# EAGLE board Line sensors - 6 (panel) (EAGLE 9.5.2)
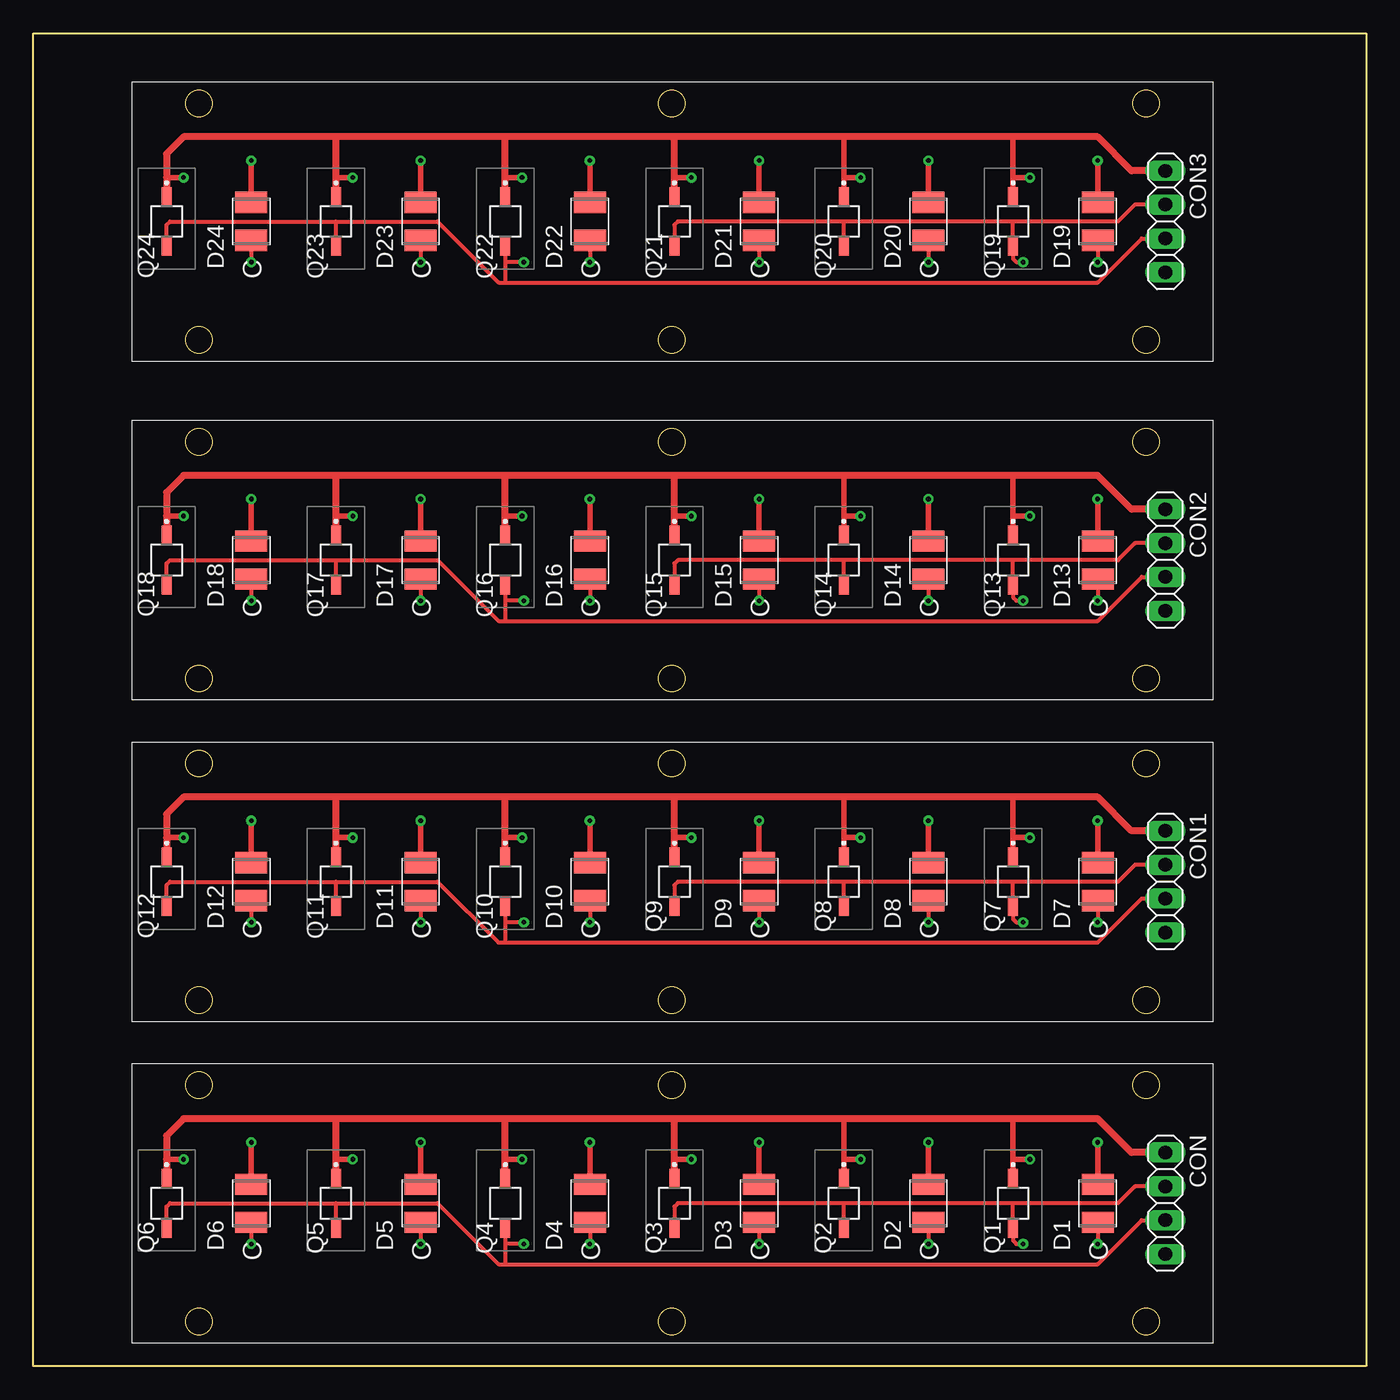
[diagram p0: board, top side]
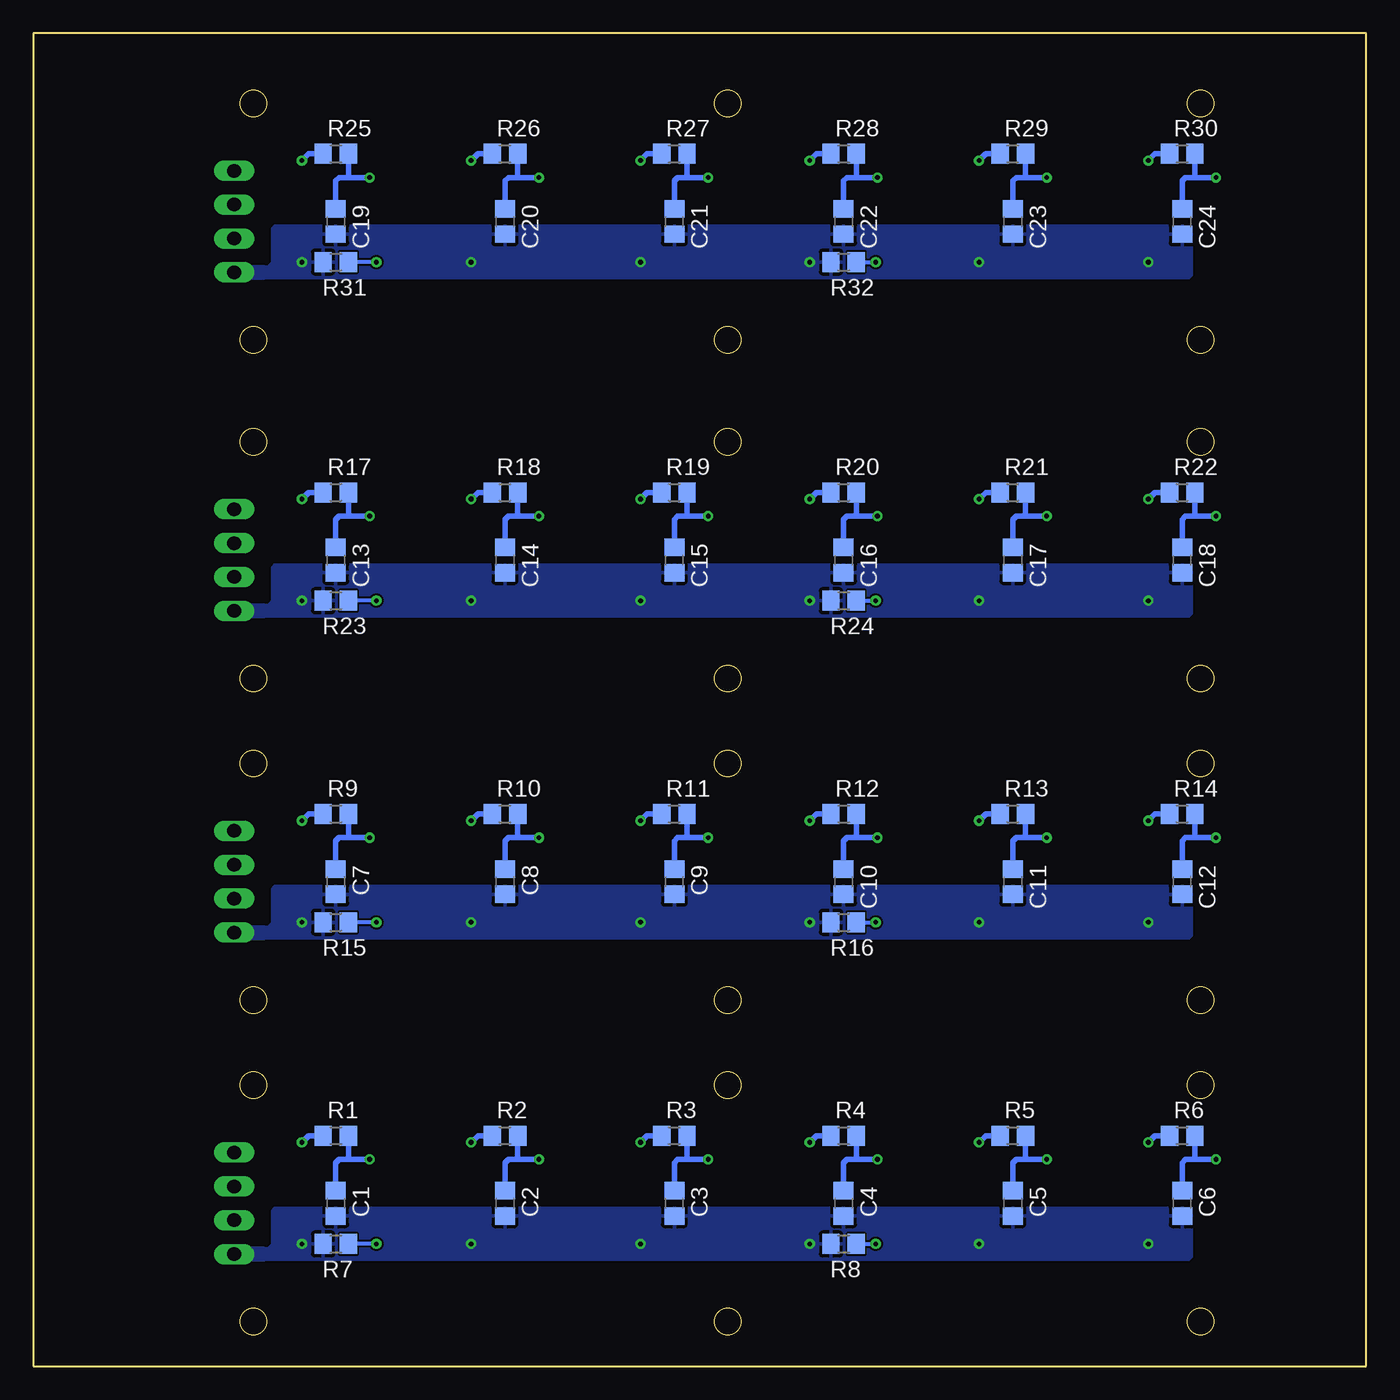
[diagram p1: board, bottom side, seen from below]

Size 100 x 100 mm. Coordinates in mm from the lower left corner, seen from the top.
Outline: 0,0 0,100 100,100 100,0 0,0
Outline: circle at 83.5,3.33 radius 1
Outline: circle at 83.5,21.09 radius 1
Outline: circle at 83.5,21.09 radius 1
Outline: circle at 12.41,21.09 radius 1
Outline: circle at 83.5,3.33 radius 1
Outline: circle at 47.91,21.09 radius 1
Outline: circle at 12.41,3.33 radius 1
Outline: circle at 47.91,3.33 radius 1
Outline: circle at 12.41,3.33 radius 1
Outline: circle at 47.91,3.33 radius 1
Outline: circle at 47.91,21.09 radius 1
Outline: circle at 12.41,21.09 radius 1
Outline: circle at 83.5,27.46 radius 1
Outline: circle at 83.5,45.22 radius 1
Outline: circle at 83.5,45.22 radius 1
Outline: circle at 12.41,45.22 radius 1
Outline: circle at 83.5,27.46 radius 1
Outline: circle at 47.91,45.22 radius 1
Outline: circle at 12.41,27.46 radius 1
Outline: circle at 47.91,27.46 radius 1
Copper layers (1*16): Top 0.035mm / dielectric 1.5mm / Bottom 0.035mm
Design rules "default": minimum track width 6mil, minimum drill 0.35mm, track to track 6mil, track to pad 6mil, pad to pad 6mil, via to via 6mil, smd to smd 6mil, copper to edge 40mil, drill to drill 6mil, minimum pad ring 10mil, minimum via ring 8mil, stop-mask expansion 4mil, vias tented up to drill 0mil, thermal gap 10mil

## Footprints (pad centres in the part's own frame; a part is rotated, then mirrored left to right if it is on the bottom)
C0805 = smd 1.3 x 1.5: 1 -0.95,0; 2 0.95,0
1X04 = drill 1.016 long: 1 -3.81,0; 2 -1.27,0; 3 1.27,0; 4 3.81,0
3528-2PIN = smd 1.6 x 2.4: 1 -1.425,0; 2 1.425,0
VEMT2520X01 = smd 1.35 x 0.75: 1 -1.9,0; 2 1.9,0
R0805 = smd 1.3 x 1.5: 1 -0.95,0; 2 0.95,0

## Placement (x,y rotation side)
C1  [C0805]  77.31,12.22 270 bottom
C2  [C0805]  64.61,12.22 270 bottom
C3  [C0805]  51.91,12.22 270 bottom
C4  [C0805]  39.21,12.22 270 bottom
C5  [C0805]  26.51,12.22 270 bottom
C6  [C0805]  13.81,12.22 270 bottom
C7  [C0805]  77.31,36.35 270 bottom
C8  [C0805]  64.61,36.35 270 bottom
C9  [C0805]  51.91,36.35 270 bottom
C10  [C0805]  39.21,36.35 270 bottom
C11  [C0805]  26.51,36.35 270 bottom
C12  [C0805]  13.81,36.35 270 bottom
C13  [C0805]  77.31,60.48 270 bottom
C14  [C0805]  64.61,60.48 270 bottom
C15  [C0805]  51.91,60.48 270 bottom
C16  [C0805]  39.21,60.48 270 bottom
C17  [C0805]  26.51,60.48 270 bottom
C18  [C0805]  13.81,60.48 270 bottom
C19  [C0805]  77.31,85.88 270 bottom
C20  [C0805]  64.61,85.88 270 bottom
C21  [C0805]  51.91,85.88 270 bottom
C22  [C0805]  39.21,85.88 270 bottom
C23  [C0805]  26.51,85.88 270 bottom
C24  [C0805]  13.81,85.88 270 bottom
CON  [1X04]  84.93,12.22 270 top
CON1  [1X04]  84.93,36.35 270 top
CON2  [1X04]  84.93,60.48 270 top
CON3  [1X04]  84.93,85.88 270 top
D1  [3528-2PIN]  79.85,12.22 90 top
D2  [3528-2PIN]  67.15,12.22 90 top
D3  [3528-2PIN]  54.45,12.22 90 top
D4  [3528-2PIN]  41.75,12.22 90 top
D5  [3528-2PIN]  29.05,12.22 90 top
D6  [3528-2PIN]  16.35,12.22 90 top
D7  [3528-2PIN]  79.85,36.35 90 top
D8  [3528-2PIN]  67.15,36.35 90 top
D9  [3528-2PIN]  54.45,36.35 90 top
D10  [3528-2PIN]  41.75,36.35 90 top
D11  [3528-2PIN]  29.05,36.35 90 top
D12  [3528-2PIN]  16.35,36.35 90 top
D13  [3528-2PIN]  79.85,60.48 90 top
D14  [3528-2PIN]  67.15,60.48 90 top
D15  [3528-2PIN]  54.45,60.48 90 top
D16  [3528-2PIN]  41.75,60.48 90 top
D17  [3528-2PIN]  29.05,60.48 90 top
D18  [3528-2PIN]  16.35,60.48 90 top
D19  [3528-2PIN]  79.85,85.88 90 top
D20  [3528-2PIN]  67.15,85.88 90 top
D21  [3528-2PIN]  54.45,85.88 90 top
D22  [3528-2PIN]  41.75,85.88 90 top
D23  [3528-2PIN]  29.05,85.88 90 top
D24  [3528-2PIN]  16.35,85.88 90 top
Q1  VEMT2520X01  [VEMT2520X01]  73.5,12.22 270 top
Q2  VEMT2520X01  [VEMT2520X01]  60.8,12.22 270 top
Q3  VEMT2520X01  [VEMT2520X01]  48.1,12.22 270 top
Q4  VEMT2520X01  [VEMT2520X01]  35.4,12.22 270 top
Q5  VEMT2520X01  [VEMT2520X01]  22.7,12.22 270 top
Q6  VEMT2520X01  [VEMT2520X01]  10,12.22 270 top
Q7  VEMT2520X01  [VEMT2520X01]  73.5,36.35 270 top
Q8  VEMT2520X01  [VEMT2520X01]  60.8,36.35 270 top
Q9  VEMT2520X01  [VEMT2520X01]  48.1,36.35 270 top
Q10  VEMT2520X01  [VEMT2520X01]  35.4,36.35 270 top
Q11  VEMT2520X01  [VEMT2520X01]  22.7,36.35 270 top
Q12  VEMT2520X01  [VEMT2520X01]  10,36.35 270 top
Q13  VEMT2520X01  [VEMT2520X01]  73.5,60.48 270 top
Q14  VEMT2520X01  [VEMT2520X01]  60.8,60.48 270 top
Q15  VEMT2520X01  [VEMT2520X01]  48.1,60.48 270 top
Q16  VEMT2520X01  [VEMT2520X01]  35.4,60.48 270 top
Q17  VEMT2520X01  [VEMT2520X01]  22.7,60.48 270 top
Q18  VEMT2520X01  [VEMT2520X01]  10,60.48 270 top
Q19  VEMT2520X01  [VEMT2520X01]  73.5,85.88 270 top
Q20  VEMT2520X01  [VEMT2520X01]  60.8,85.88 270 top
Q21  VEMT2520X01  [VEMT2520X01]  48.1,85.88 270 top
Q22  VEMT2520X01  [VEMT2520X01]  35.4,85.88 270 top
Q23  VEMT2520X01  [VEMT2520X01]  22.7,85.88 270 top
Q24  VEMT2520X01  [VEMT2520X01]  10,85.88 270 top
R1  [R0805]  77.31,17.3 0 bottom
R2  [R0805]  64.61,17.3 0 bottom
R3  [R0805]  51.91,17.3 0 bottom
R4  [R0805]  39.21,17.3 0 bottom
R5  [R0805]  26.51,17.3 0 bottom
R6  [R0805]  13.81,17.3 0 bottom
R7  [R0805]  77.31,9.17 0 bottom
R8  [R0805]  39.21,9.17 0 bottom
R9  [R0805]  77.31,41.43 0 bottom
R10  [R0805]  64.61,41.43 0 bottom
R11  [R0805]  51.91,41.43 0 bottom
R12  [R0805]  39.21,41.43 0 bottom
R13  [R0805]  26.51,41.43 0 bottom
R14  [R0805]  13.81,41.43 0 bottom
R15  [R0805]  77.31,33.3 0 bottom
R16  [R0805]  39.21,33.3 0 bottom
R17  [R0805]  77.31,65.56 0 bottom
R18  [R0805]  64.61,65.56 0 bottom
R19  [R0805]  51.91,65.56 0 bottom
R20  [R0805]  39.21,65.56 0 bottom
R21  [R0805]  26.51,65.56 0 bottom
R22  [R0805]  13.81,65.56 0 bottom
R23  [R0805]  77.31,57.43 0 bottom
R24  [R0805]  39.21,57.43 0 bottom
R25  [R0805]  77.31,90.96 0 bottom
R26  [R0805]  64.61,90.96 0 bottom
R27  [R0805]  51.91,90.96 0 bottom
R28  [R0805]  39.21,90.96 0 bottom
R29  [R0805]  26.51,90.96 0 bottom
R30  [R0805]  13.81,90.96 0 bottom
R31  [R0805]  77.31,82.83 0 bottom
R32  [R0805]  39.21,82.83 0 bottom

## Library data of the parts
C1-C24 = rcl; SPICEPREFIX: C
CON CON1-CON3 = pinhead
D1-D24 = Wurth_Elektronik_Optoelectronics_rev15b; COMPANY-URL: http://www.we-online.de; CREATED-BY: Christin Otto; CREATED-DATE: APR 2013; DATASHEET-URL: http://katalog.we-online.de/en/led/WL-SMTW?m=t&sq=smtw&sp=&sp=http%3A%2F%2Fwww.we-online.de%2Fweb%2Fen%2Felectronic_components%2Fsearchpage_PBS.php%3Fsearch%3Dsmtw; MANUFACTURER: Würth Elektronik eiSos GmbH
Q1-Q24 = Fototransistor; DESCRIPTION: Vishay VEMT2520X01 +/-15 IR + Visible Light Phototransistor, Surface Mount 2-Pin Reverse Gullwing Package; HEIGHT: 2mm; MANUFACTURER_NAME: Vishay; MANUFACTURER_PART_NUMBER: VEMT2520X01; MOUSER_PART_NUMBER: 782-VEMT2520X01; MOUSER_PRICE-STOCK: https://www.mouser.com/Search/Refine.aspx?Keyword=782-VEMT2520X01; RS_PART_NUMBER: 7689417P; RS_PRICE-STOCK: http://uk.rs-online.com/web/p/products/7689417P
R1-R32 = rcl; SPICEPREFIX: R

## Nets
GND: C1.2 C2.2 C3.2 C4.2 C5.2 C6.2 CON.4 D1.1 D2.1 D3.1 D4.1 D5.1 D6.1 R7.1 R8.1
GND1: C7.2 C8.2 C9.2 C10.2 C11.2 C12.2 CON1.4 D7.1 D8.1 D9.1 D10.1 D11.1 D12.1 R15.1 R16.1
GND2: C13.2 C14.2 C15.2 C16.2 C17.2 C18.2 CON2.4 D13.1 D14.1 D15.1 D16.1 D17.1 D18.1 R23.1 R24.1
GND3: C19.2 C20.2 C21.2 C22.2 C23.2 C24.2 CON3.4 D19.1 D20.1 D21.1 D22.1 D23.1 D24.1 R31.1 R32.1
N$1: D1.2 R1.1
N$2: D2.2 R2.1
N$3: D3.2 R3.1
N$4: D4.2 R4.1
N$5: D5.2 R5.1
N$6: D6.2 R6.1
N$7: D7.2 R9.1
N$8: D8.2 R10.1
N$9: D9.2 R11.1
N$10: D10.2 R12.1
N$11: D11.2 R13.1
N$12: D12.2 R14.1
N$13: D13.2 R17.1
N$14: D14.2 R18.1
N$15: D15.2 R19.1
N$16: D16.2 R20.1
N$17: D17.2 R21.1
N$18: D18.2 R22.1
N$19: D19.2 R25.1
N$20: D20.2 R26.1
N$21: D21.2 R27.1
N$22: D22.2 R28.1
N$23: D23.2 R29.1
N$24: D24.2 R30.1
SIG1: CON.2 Q1.2 Q2.2 Q3.2 R7.2
SIG2: CON.3 Q4.2 Q5.2 Q6.2 R8.2
SIG3: CON1.2 Q7.2 Q8.2 Q9.2 R15.2
SIG4: CON1.3 Q10.2 Q11.2 Q12.2 R16.2
SIG5: CON2.2 Q13.2 Q14.2 Q15.2 R23.2
SIG6: CON2.3 Q16.2 Q17.2 Q18.2 R24.2
SIG7: CON3.2 Q19.2 Q20.2 Q21.2 R31.2
SIG8: CON3.3 Q22.2 Q23.2 Q24.2 R32.2
V+: C1.1 C2.1 C3.1 C4.1 C5.1 C6.1 CON.1 Q1.1 Q2.1 Q3.1 Q4.1 Q5.1 Q6.1 R1.2 R2.2 R3.2 R4.2 R5.2 R6.2
V+1: C7.1 C8.1 C9.1 C10.1 C11.1 C12.1 CON1.1 Q7.1 Q8.1 Q9.1 Q10.1 Q11.1 Q12.1 R9.2 R10.2 R11.2 R12.2 R13.2 R14.2
V+2: C13.1 C14.1 C15.1 C16.1 C17.1 C18.1 CON2.1 Q13.1 Q14.1 Q15.1 Q16.1 Q17.1 Q18.1 R17.2 R18.2 R19.2 R20.2 R21.2 R22.2
V+3: C19.1 C20.1 C21.1 C22.1 C23.1 C24.1 CON3.1 Q19.1 Q20.1 Q21.1 Q22.1 Q23.1 Q24.1 R25.2 R26.2 R27.2 R28.2 R29.2 R30.2

## Tracks (layer width: path | path; a pad name or v marks a point on that pad's centre or on a via)
GND  (via drill 0.35)
  Top 0.305: D6.1 v16.35,9.17 | D5.1 v29.05,9.17 | D4.1 v41.75,9.17 | D3.1 v54.45,9.17 | D2.1 v67.15,9.17 | D1.1 v79.85,9.17
  pour Bottom (no thermals): 82.64,8.92 84.93,8.92 84.93,7.9 82.64,7.9
  pour Bottom: 13.05,11.97 13.05,8.16 13.3,7.9 82.9,7.9 82.9,8.92 82.39,8.92 82.14,9.17 82.14,11.71 81.88,11.97
GND1  (via drill 0.35)
  Top 0.305: D12.1 v16.35,33.3 | D11.1 v29.05,33.3 | D10.1 v41.75,33.3 | D9.1 v54.45,33.3 | D8.1 v67.15,33.3 | D7.1 v79.85,33.3
  pour Bottom (no thermals): 82.64,33.05 84.93,33.05 84.93,32.03 82.64,32.03
  pour Bottom: 13.05,36.1 13.05,32.29 13.3,32.03 82.9,32.03 82.9,33.05 82.39,33.05 82.14,33.3 82.14,35.84 81.88,36.1
GND2  (via drill 0.35)
  Top 0.305: D18.1 v16.35,57.43 | D17.1 v29.05,57.43 | D16.1 v41.75,57.43 | D15.1 v54.45,57.43 | D14.1 v67.15,57.43 | D13.1 v79.85,57.43
  pour Bottom (no thermals): 82.64,57.18 84.93,57.18 84.93,56.16 82.64,56.16
  pour Bottom: 13.05,60.23 13.05,56.42 13.3,56.16 82.9,56.16 82.9,57.18 82.39,57.18 82.14,57.43 82.14,59.97 81.88,60.23
GND3  (via drill 0.35)
  Top 0.305: D24.1 v16.35,82.83 | D23.1 v29.05,82.83 | D22.1 v41.75,82.83 | D21.1 v54.45,82.83 | D20.1 v67.15,82.83 | D19.1 v79.85,82.83
  pour Bottom (no thermals): 82.64,82.58 84.93,82.58 84.93,81.56 82.64,81.56
  pour Bottom: 13.05,85.63 13.05,81.82 13.3,81.56 82.9,81.56 82.9,82.58 82.39,82.58 82.14,82.83 82.14,85.37 81.88,85.63
N$1  (via drill 0.35)
  Top 0.406: v79.85,16.79 D1.2
  Bottom 0.406: R1.1 79.34,17.3 v79.85,16.79
N$2  (via drill 0.35)
  Top 0.406: v67.15,16.79 D2.2
  Bottom 0.406: R2.1 66.64,17.3 v67.15,16.79
N$3  (via drill 0.35)
  Top 0.406: v54.45,16.79 D3.2
  Bottom 0.406: R3.1 53.94,17.3 v54.45,16.79
N$4  (via drill 0.35)
  Top 0.406: v41.75,16.79 D4.2
  Bottom 0.406: R4.1 41.24,17.3 v41.75,16.79
N$5  (via drill 0.35)
  Top 0.406: v29.05,16.79 D5.2
  Bottom 0.406: R5.1 28.54,17.3 v29.05,16.79
N$6  (via drill 0.35)
  Top 0.406: v16.35,16.79 D6.2
  Bottom 0.406: R6.1 15.84,17.3 v16.35,16.79
N$7  (via drill 0.35)
  Top 0.406: v79.85,40.92 D7.2
  Bottom 0.406: R9.1 79.34,41.43 v79.85,40.92
N$8  (via drill 0.35)
  Top 0.406: v67.15,40.92 D8.2
  Bottom 0.406: R10.1 66.64,41.43 v67.15,40.92
N$9  (via drill 0.35)
  Top 0.406: v54.45,40.92 D9.2
  Bottom 0.406: R11.1 53.94,41.43 v54.45,40.92
N$10  (via drill 0.35)
  Top 0.406: v41.75,40.92 D10.2
  Bottom 0.406: R12.1 41.24,41.43 v41.75,40.92
N$11  (via drill 0.35)
  Top 0.406: v29.05,40.92 D11.2
  Bottom 0.406: R13.1 28.54,41.43 v29.05,40.92
N$12  (via drill 0.35)
  Top 0.406: v16.35,40.92 D12.2
  Bottom 0.406: R14.1 15.84,41.43 v16.35,40.92
N$13  (via drill 0.35)
  Top 0.406: v79.85,65.05 D13.2
  Bottom 0.406: R17.1 79.34,65.56 v79.85,65.05
N$14  (via drill 0.35)
  Top 0.406: v67.15,65.05 D14.2
  Bottom 0.406: R18.1 66.64,65.56 v67.15,65.05
N$15  (via drill 0.35)
  Top 0.406: v54.45,65.05 D15.2
  Bottom 0.406: R19.1 53.94,65.56 v54.45,65.05
N$16  (via drill 0.35)
  Top 0.406: v41.75,65.05 D16.2
  Bottom 0.406: R20.1 41.24,65.56 v41.75,65.05
N$17  (via drill 0.35)
  Top 0.406: v29.05,65.05 D17.2
  Bottom 0.406: R21.1 28.54,65.56 v29.05,65.05
N$18  (via drill 0.35)
  Top 0.406: v16.35,65.05 D18.2
  Bottom 0.406: R22.1 15.84,65.56 v16.35,65.05
N$19  (via drill 0.35)
  Top 0.406: v79.85,90.45 D19.2
  Bottom 0.406: R25.1 79.34,90.96 v79.85,90.45
N$20  (via drill 0.35)
  Top 0.406: v67.15,90.45 D20.2
  Bottom 0.406: R26.1 66.64,90.96 v67.15,90.45
N$21  (via drill 0.35)
  Top 0.406: v54.45,90.45 D21.2
  Bottom 0.406: R27.1 53.94,90.96 v54.45,90.45
N$22  (via drill 0.35)
  Top 0.406: v41.75,90.45 D22.2
  Bottom 0.406: R28.1 41.24,90.96 v41.75,90.45
N$23  (via drill 0.35)
  Top 0.406: v29.05,90.45 D23.2
  Bottom 0.406: R29.1 28.54,90.96 v29.05,90.45
N$24  (via drill 0.35)
  Top 0.406: v16.35,90.45 D24.2
  Bottom 0.406: R30.1 15.84,90.96 v16.35,90.45
SIG1  (via drill 0.35)
  Top 0.305: 73.5,12.22 81.37,12.22 82.64,13.49 CON.2 | 73.5,12.22 60.8,12.22 | 60.8,12.22 48.35,12.22 48.1,11.97 Q3.2 | Q2.2 60.8,12.22 | 73.5,12.22 Q1.2 73.5,9.43 73.75,9.17 v74.26,9.17
  Bottom 0.305: v74.26,9.17 R7.2
SIG2  (via drill 0.35)
  Top 0.305: Q6.2 10,11.97 10.25,12.22 22.7,12.22 | Q5.2 22.7,12.22 | CON.3 83.15,10.95 79.85,7.65 35.4,7.65 | 22.7,12.22 30.32,12.22 34.89,7.65 35.4,7.65 | Q4.2 35.4,9.17 | 35.4,9.17 35.4,7.65 | v36.8,9.17 35.4,9.17
  Bottom 0.305: R8.2 v36.8,9.17
SIG3  (via drill 0.35)
  Top 0.305: 73.5,36.35 81.37,36.35 82.64,37.62 CON1.2 | 73.5,36.35 60.8,36.35 | 60.8,36.35 48.35,36.35 48.1,36.1 Q9.2 | Q8.2 60.8,36.35 | 73.5,36.35 Q7.2 73.5,33.56 73.75,33.3 v74.26,33.3
  Bottom 0.305: v74.26,33.3 R15.2
SIG4  (via drill 0.35)
  Top 0.305: Q12.2 10,36.1 10.25,36.35 22.7,36.35 | Q11.2 22.7,36.35 | CON1.3 83.15,35.08 79.85,31.78 35.4,31.78 | 22.7,36.35 30.32,36.35 34.89,31.78 35.4,31.78 | Q10.2 35.4,33.3 | 35.4,33.3 35.4,31.78 | v36.8,33.3 35.4,33.3
  Bottom 0.305: R16.2 v36.8,33.3
SIG5  (via drill 0.35)
  Top 0.305: 73.5,60.48 81.37,60.48 82.64,61.75 CON2.2 | 73.5,60.48 60.8,60.48 | 60.8,60.48 48.35,60.48 48.1,60.23 Q15.2 | Q14.2 60.8,60.48 | 73.5,60.48 Q13.2 73.5,57.69 73.75,57.43 v74.26,57.43
  Bottom 0.305: v74.26,57.43 R23.2
SIG6  (via drill 0.35)
  Top 0.305: Q18.2 10,60.23 10.25,60.48 22.7,60.48 | Q17.2 22.7,60.48 | CON2.3 83.15,59.21 79.85,55.91 35.4,55.91 | 22.7,60.48 30.32,60.48 34.89,55.91 35.4,55.91 | Q16.2 35.4,57.43 | 35.4,57.43 35.4,55.91 | v36.8,57.43 35.4,57.43
  Bottom 0.305: R24.2 v36.8,57.43
SIG7  (via drill 0.35)
  Top 0.305: 73.5,85.88 81.37,85.88 82.64,87.15 CON3.2 | 73.5,85.88 60.8,85.88 | 60.8,85.88 48.35,85.88 48.1,85.63 Q21.2 | Q20.2 60.8,85.88 | 73.5,85.88 Q19.2 73.5,83.09 73.75,82.83 v74.26,82.83
  Bottom 0.305: v74.26,82.83 R31.2
SIG8  (via drill 0.35)
  Top 0.305: Q24.2 10,85.63 10.25,85.88 22.7,85.88 | Q23.2 22.7,85.88 | CON3.3 83.15,84.61 79.85,81.31 35.4,81.31 | 22.7,85.88 30.32,85.88 34.89,81.31 35.4,81.31 | Q22.2 35.4,82.83 | 35.4,82.83 35.4,81.31 | v36.8,82.83 35.4,82.83
  Bottom 0.305: R32.2 v36.8,82.83
V+  (via drill 0.35)
  Top 0.406: Q1.1 73.5,15.52 | 73.5,15.52 73.5,18.57 | 73.5,15.52 v74.77,15.52 | Q2.1 60.8,15.52 | 60.8,15.52 60.8,18.57 | 60.8,15.52 v62.07,15.52 | 48.1,15.52 v49.37,15.52 | 35.4,15.52 v36.67,15.52 | 22.7,15.52 v23.97,15.52 | 10,15.52 v11.27,15.52
  Top 0.508: CON.1 82.39,16.03 79.85,18.57 73.5,18.57 60.8,18.57 48.1,18.57 | 48.1,18.57 35.4,18.57 | 35.4,18.57 22.7,18.57 | 22.7,18.57 11.27,18.57 10,17.3 10,15.52 Q6.1 | Q5.1 22.7,15.52 22.7,18.57 | Q4.1 35.4,15.52 35.4,18.57 | Q3.1 48.1,15.52 48.1,18.57
  Bottom 0.406: v74.77,15.52 76.42,15.52 | 76.42,15.52 77.06,15.52 77.31,15.27 C1.1 | R1.2 76.36,15.58 76.42,15.52 | v62.07,15.52 63.72,15.52 | 63.72,15.52 64.36,15.52 64.61,15.27 C2.1 | R2.2 63.66,15.58 63.72,15.52 | C3.1 51.91,15.27 51.66,15.52 50.89,15.52 | v49.37,15.52 50.89,15.52 | R3.2 50.96,15.59 50.89,15.52 | v36.67,15.52 38.19,15.52 | 38.19,15.52 38.96,15.52 39.21,15.27 C4.1 | R4.2 38.26,15.59 38.19,15.52 | v23.97,15.52 25.49,15.52 | 25.49,15.52 26.26,15.52 26.51,15.27 C5.1 | R5.2 25.56,15.59 25.49,15.52 | v11.27,15.52 12.79,15.52 | 12.79,15.52 13.56,15.52 13.81,15.27 C6.1 | R6.2 12.86,15.59 12.79,15.52
V+1  (via drill 0.35)
  Top 0.406: Q7.1 73.5,39.65 | 73.5,39.65 73.5,42.7 | 73.5,39.65 v74.77,39.65 | Q8.1 60.8,39.65 | 60.8,39.65 60.8,42.7 | 60.8,39.65 v62.07,39.65 | 48.1,39.65 v49.37,39.65 | 35.4,39.65 v36.67,39.65 | 22.7,39.65 v23.97,39.65 | 10,39.65 v11.27,39.65
  Top 0.508: CON1.1 82.39,40.16 79.85,42.7 73.5,42.7 60.8,42.7 48.1,42.7 | 48.1,42.7 35.4,42.7 | 35.4,42.7 22.7,42.7 | 22.7,42.7 11.27,42.7 10,41.43 10,39.65 Q12.1 | Q11.1 22.7,39.65 22.7,42.7 | Q10.1 35.4,39.65 35.4,42.7 | Q9.1 48.1,39.65 48.1,42.7
  Bottom 0.406: v74.77,39.65 76.42,39.65 | 76.42,39.65 77.06,39.65 77.31,39.4 C7.1 | R9.2 76.36,39.71 76.42,39.65 | v62.07,39.65 63.72,39.65 | 63.72,39.65 64.36,39.65 64.61,39.4 C8.1 | R10.2 63.66,39.71 63.72,39.65 | C9.1 51.91,39.4 51.66,39.65 50.89,39.65 | v49.37,39.65 50.89,39.65 | R11.2 50.96,39.72 50.89,39.65 | v36.67,39.65 38.19,39.65 | 38.19,39.65 38.96,39.65 39.21,39.4 C10.1 | R12.2 38.26,39.72 38.19,39.65 | v23.97,39.65 25.49,39.65 | 25.49,39.65 26.26,39.65 26.51,39.4 C11.1 | R13.2 25.56,39.72 25.49,39.65 | v11.27,39.65 12.79,39.65 | 12.79,39.65 13.56,39.65 13.81,39.4 C12.1 | R14.2 12.86,39.72 12.79,39.65
V+2  (via drill 0.35)
  Top 0.406: Q13.1 73.5,63.78 | 73.5,63.78 73.5,66.83 | 73.5,63.78 v74.77,63.78 | Q14.1 60.8,63.78 | 60.8,63.78 60.8,66.83 | 60.8,63.78 v62.07,63.78 | 48.1,63.78 v49.37,63.78 | 35.4,63.78 v36.67,63.78 | 22.7,63.78 v23.97,63.78 | 10,63.78 v11.27,63.78
  Top 0.508: CON2.1 82.39,64.29 79.85,66.83 73.5,66.83 60.8,66.83 48.1,66.83 | 48.1,66.83 35.4,66.83 | 35.4,66.83 22.7,66.83 | 22.7,66.83 11.27,66.83 10,65.56 10,63.78 Q18.1 | Q17.1 22.7,63.78 22.7,66.83 | Q16.1 35.4,63.78 35.4,66.83 | Q15.1 48.1,63.78 48.1,66.83
  Bottom 0.406: v74.77,63.78 76.42,63.78 | 76.42,63.78 77.06,63.78 77.31,63.53 C13.1 | R17.2 76.36,63.84 76.42,63.78 | v62.07,63.78 63.72,63.78 | 63.72,63.78 64.36,63.78 64.61,63.53 C14.1 | R18.2 63.66,63.84 63.72,63.78 | C15.1 51.91,63.53 51.66,63.78 50.89,63.78 | v49.37,63.78 50.89,63.78 | R19.2 50.96,63.85 50.89,63.78 | v36.67,63.78 38.19,63.78 | 38.19,63.78 38.96,63.78 39.21,63.53 C16.1 | R20.2 38.26,63.85 38.19,63.78 | v23.97,63.78 25.49,63.78 | 25.49,63.78 26.26,63.78 26.51,63.53 C17.1 | R21.2 25.56,63.85 25.49,63.78 | v11.27,63.78 12.79,63.78 | 12.79,63.78 13.56,63.78 13.81,63.53 C18.1 | R22.2 12.86,63.85 12.79,63.78
V+3  (via drill 0.35)
  Top 0.406: Q19.1 73.5,89.18 | 73.5,89.18 73.5,92.23 | 73.5,89.18 v74.77,89.18 | Q20.1 60.8,89.18 | 60.8,89.18 60.8,92.23 | 60.8,89.18 v62.07,89.18 | 48.1,89.18 v49.37,89.18 | 35.4,89.18 v36.67,89.18 | 22.7,89.18 v23.97,89.18 | 10,89.18 v11.27,89.18
  Top 0.508: CON3.1 82.39,89.69 79.85,92.23 73.5,92.23 60.8,92.23 48.1,92.23 | 48.1,92.23 35.4,92.23 | 35.4,92.23 22.7,92.23 | 22.7,92.23 11.27,92.23 10,90.96 10,89.18 Q24.1 | Q23.1 22.7,89.18 22.7,92.23 | Q22.1 35.4,89.18 35.4,92.23 | Q21.1 48.1,89.18 48.1,92.23
  Bottom 0.406: v74.77,89.18 76.42,89.18 | 76.42,89.18 77.06,89.18 77.31,88.93 C19.1 | R25.2 76.36,89.24 76.42,89.18 | v62.07,89.18 63.72,89.18 | 63.72,89.18 64.36,89.18 64.61,88.93 C20.1 | R26.2 63.66,89.24 63.72,89.18 | C21.1 51.91,88.93 51.66,89.18 50.89,89.18 | v49.37,89.18 50.89,89.18 | R27.2 50.96,89.25 50.89,89.18 | v36.67,89.18 38.19,89.18 | 38.19,89.18 38.96,89.18 39.21,88.93 C22.1 | R28.2 38.26,89.25 38.19,89.18 | v23.97,89.18 25.49,89.18 | 25.49,89.18 26.26,89.18 26.51,88.93 C23.1 | R29.2 25.56,89.25 25.49,89.18 | v11.27,89.18 12.79,89.18 | 12.79,89.18 13.56,89.18 13.81,88.93 C24.1 | R30.2 12.86,89.25 12.79,89.18